# EAGLE board 526_outin_pico_cardedge (EAGLE 9.6.2)
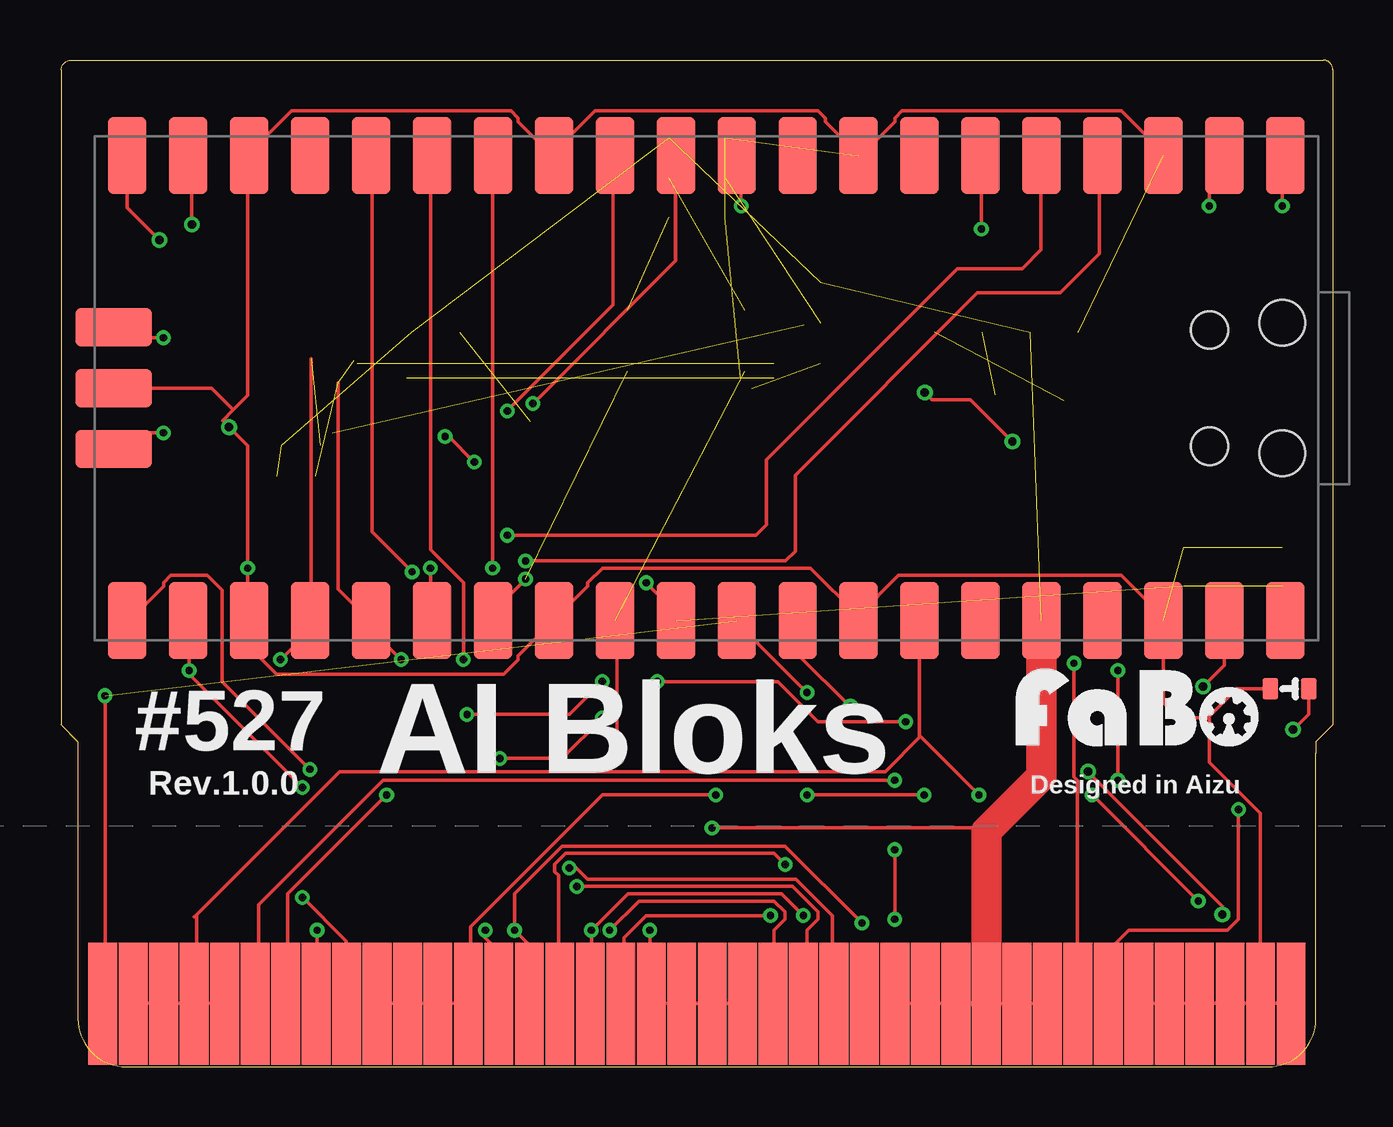
[diagram p0: board, top side]
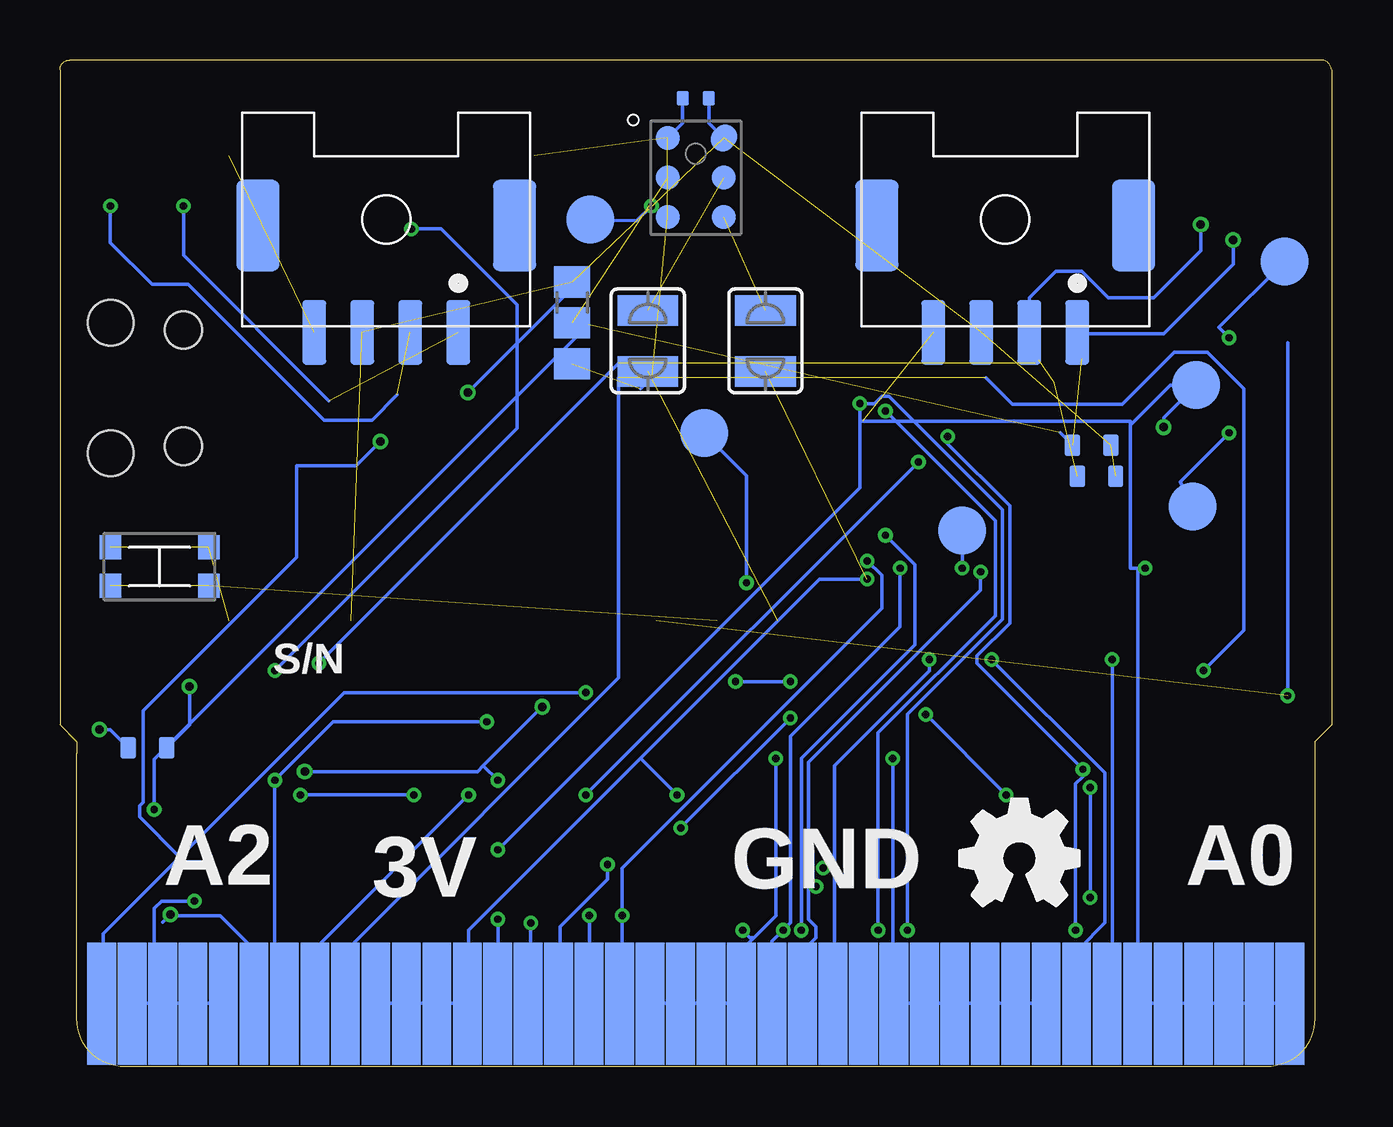
[diagram p1: board, bottom side, seen from below]

Size 53 x 41.95 mm. Coordinates in mm from the lower left corner, seen from the top.
Outline: 0.7,13.07 0.7,13.55 0,14.25 0,41.55 arc-77 0.4,41.95 52.6,41.95 arc-90 53,41.55 53,14.25 52.3,13.55 52.3,13.07
Copper layers (1*16): Top 0.035mm / dielectric 1.6mm / Bottom 0.035mm
Design rules "PCBway": minimum track width 6mil, minimum drill 12mil, track to track 6mil, track to pad 6mil, pad to pad 6mil, via to via 6mil, smd to smd 6mil, copper to edge 10mil, drill to drill 10mil, minimum pad ring 10mil, minimum via ring 6mil, stop-mask expansion 2mil, vias tented up to drill 100mil, thermal gap 8mil

## Footprints (pad centres in the part's own frame; a part is rotated, then mirrored left to right if it is on the bottom)
0402 = smd 0.5 x 0.6: 1 -0.55,0; 2 0.55,0
SM04B-PASS = smd 1 x 2.7: 1 3,-11.85; 2 1,-11.85; 3 -1,-11.85; 4 -3,-11.85 | smd 1.8 x 3.8: P$1 5.35,-7.4; P$2 -5.35,-7.4
TP20R = smd 2 x 2: TP 0,0
A0R-JMP = smd 1.5 x 1.3: 1 0,1.7; 2 0,0; 3 0,-1.7
0603 = smd 0.65 x 0.9: ANODE -0.8,0; CATHODE 0.8,0
0603' = smd 0.65 x 0.9: 1 -0.8,0; 2 0.8,0
KMR2 = smd 0.9 x 1: 1 -2.05,0.8; 2 2.05,0.8; 3 2.05,-0.8; 4 -2.05,-0.8
SJW = smd 1.27 x 2.54: 1 -1.27,0; 2 1.27,0
RASPBERRY_PI_PICO_SMD = smd 3.2 x 1.6: 1 -9.69,24.13; 2 -9.69,21.59; 3 -9.69,19.05; 4 -9.69,16.51; 5 -9.69,13.97; 6 -9.69,11.43; 7 -9.69,8.89; 8 -9.69,6.35; 9 -9.69,3.81; 10 -9.69,1.27; 11 -9.69,-1.27; 12 -9.69,-3.81; 13 -9.69,-6.35; 14 -9.69,-8.89; 15 -9.69,-11.43; 16 -9.69,-13.97; 17 -9.69,-16.51; 18 -9.69,-19.05; 19 -9.69,-21.59; 20 -9.69,-24.13; 21 9.69,-24.13; 22 9.69,-21.59; 23 9.69,-19.05; 24 9.69,-16.51; 25 9.69,-13.97; 26 9.69,-11.43; 27 9.69,-8.89; 28 9.69,-6.35; 29 9.69,-3.81; 30 9.69,-1.27; 31 9.69,1.27; 32 9.69,3.81; 33 9.69,6.35; 34 9.69,8.89; 35 9.69,11.43; 36 9.69,13.97; 37 9.69,16.51; 38 9.69,19.05; 39 9.69,21.59; 40 9.69,24.13 | smd 1.6 x 3.2: D1 -2.54,-24.7; D2 0,-24.7; D3 2.54,-24.7 | hole 1.9: 2.725,24; -2.725,24 | hole 1.55: 2.425,20.97; -2.425,20.97
SPM4050 = smd 1 x 1: 1:GND -1.169,1.651; 2:LEFT/RIGHT -1.169,0; 3:GND -1.169,-1.651; 4:CLOCK 1.169,-1.651; 5:DATA 1.169,0 | smd 1.15 x 1 rotated 45: 6:VDD 1.169,1.651
BBC_EDGE = smd 1.2 x 5.08: P$1 -50.215,2.673; P$2 -48.945,2.673; P$3 -47.675,2.673; P$4 -46.405,2.673; P$5 -45.135,2.673; P$6 -43.865,2.673; P$7 -42.595,2.673; P$8 -41.325,2.673; P$9 -40.055,2.673; P$10 -38.785,2.673; P$11 -37.515,2.673; P$12 -36.245,2.673; P$13 -34.975,2.673; P$14 -33.705,2.673; P$15 -32.435,2.673; P$16 -31.165,2.673; P$17 -29.895,2.673; P$18 -28.625,2.673; P$19 -27.355,2.673; P$20 -26.085,2.673; P$21 -24.815,2.673; P$22 -23.545,2.673; P$23 -22.275,2.673; P$24 -21.005,2.673; P$25 -19.735,2.673; P$26 -18.465,2.673; P$27 -17.195,2.673; P$28 -15.925,2.673; P$29 -14.655,2.673; P$30 -13.385,2.673; P$31 -12.115,2.673; P$32 -10.845,2.673; P$33 -9.575,2.673; P$34 -8.305,2.673; P$35 -7.035,2.673; P$36 -5.765,2.673; P$37 -4.495,2.673; P$38 -3.225,2.673; P$39 -1.955,2.673; P$40 -0.685,2.673 | smd 1.2 x 5.08 bottom: P$41 -0.685,2.673; P$42 -1.955,2.673; P$43 -3.225,2.673; P$44 -4.495,2.673; P$45 -5.765,2.673; P$46 -7.035,2.673; P$47 -8.305,2.673; P$48 -9.575,2.673; P$49 -10.845,2.673; P$50 -12.115,2.673; P$51 -13.385,2.673; P$52 -14.655,2.673; P$53 -15.925,2.673; P$54 -17.195,2.673; P$55 -18.465,2.673; P$56 -19.735,2.673; P$57 -21.005,2.673; P$58 -22.275,2.673; P$59 -23.545,2.673; P$60 -24.815,2.673; P$61 -26.085,2.673; P$62 -27.355,2.673; P$63 -28.625,2.673; P$64 -29.895,2.673; P$65 -31.165,2.673; P$66 -32.435,2.673; P$67 -33.705,2.673; P$68 -34.975,2.673; P$69 -36.245,2.673; P$70 -37.515,2.673; P$71 -38.785,2.673; P$72 -40.055,2.673; P$73 -41.325,2.673; P$74 -42.595,2.673; P$75 -43.865,2.673; P$76 -45.135,2.673; P$77 -46.405,2.673; P$78 -47.675,2.673; P$79 -48.945,2.673; P$80 -50.215,2.673

## Placement (x,y rotation side)
C1  0.1uF  [0402]  26.5,40.35 0 bottom
CN1  [SM04B-PASS]  39.4,42.45 0 bottom
CN2  [SM04B-PASS]  13.6,42.45 0 bottom
GP7  TPSQTP20R  [TP20R]  30.9,35.3 0 bottom
JMP1  0R-JUMPA  [A0R-JMP]  31.65,31 0 bottom
LED1  [0603]  51.2,15.75 180 top
LOGO1  [LOGO_OSHW_M_BOTTOM]  13,8.69 0 top
LOGO2  [LOGO_FABO_M]  44.86,12.97 0 top
R1  470  [0603']  49.35,13.3 180 bottom
R2  [0603']  9.8,24.6 0 bottom
R3  [0603']  10,25.9 0 bottom
S2  [KMR2]  48.85,20.84 180 bottom
SJ1  [SJW]  23.6,30.25 270 bottom
SJ2  [SJW]  28.5,30.25 270 bottom
TP1  TPSQTP20R  [TP20R]  1.95,33.55 0 bottom
TP2  TPSQTP20R  [TP20R]  5.8,23.35 0 bottom
TP3  TPSQTP20R  [TP20R]  5.65,28.4 0 bottom
TP4  TPSQTP20R  [TP20R]  26.15,26.4 0 bottom
TP10  TPSQTP20R  [TP20R]  15.4,22.35 0 bottom
U1  [RASPBERRY_PI_PICO_SMD]  26.89,28.28 270 top
U$1  SPM0405H  [SPM4050]  26.5,37.05 0 bottom
U$2  BBC_EDGE  [BBC_EDGE]  51.95,-0.05 0 top

## Library data of the parts
C1 = FaBo-Capacitor
CN1 CN2 = FaBo-Connetor
GP7 TP1-TP4 TP10 = testpad
JMP1 = jump-0r-smd
LED1 = FaBo-LED
LOGO1 LOGO2 = FaBo-Logo
R1-R3 = FaBo-Resistors
S2 = FaBo-Switch
SJ1 SJ2 = jumper
U1 = FaBo-Boards
U$1 = FaBo-Sensor
U$2 = microbit

## Nets
3V3: C1.2 CN1.3 CN2.3 JMP1.1 R2.2 R3.2 U1.36 U$1.6:VDD U$2.P$27 U$2.P$28 U$2.P$29 U$2.P$30 U$2.P$31 U$2.P$32 U$2.P$67 U$2.P$68 U$2.P$69 U$2.P$70 U$2.P$71 U$2.P$72
A0: U1.31 U$2.P$1 U$2.P$41
A1: U1.32 U$2.P$6 U$2.P$46
A2: U1.34 U$2.P$2 U$2.P$3 U$2.P$4 U$2.P$5 U$2.P$42 U$2.P$43 U$2.P$44 U$2.P$45
D2: U1.4 U$2.P$18 U$2.P$58
D3: U1.5 U$2.P$17 U$2.P$57
D4: U1.6 U$2.P$7 U$2.P$47
D5_PWM: U1.7
D6_PWM: U1.9
D8: U1.11 U$2.P$14 U$2.P$54
D9_LEDS: U1.12 U$2.P$15 U$2.P$55
GND: C1.1 CN1.4 CN2.4 JMP1.3 LED1.CATHODE S2.3 S2.4 TP3.TP U1.3 U1.8 U1.13 U1.18 U1.23 U1.28 U1.33 U1.38 U1.D2 U$1.1:GND U$1.3:GND U$2.P$35 U$2.P$36 U$2.P$37 U$2.P$38 U$2.P$39 U$2.P$40 U$2.P$75 U$2.P$76 U$2.P$77 U$2.P$78 U$2.P$79 U$2.P$80
GP14: CN2.2 U1.19
GP15: CN2.1 U1.20
GP16: U$2.P$16 U$2.P$56
GP16_PWM_UART0_TX: U1.21 U$2.P$8 U$2.P$48
GP17_PWM_UART0_RX: U1.22 U$2.P$9 U$2.P$49
I2C1_SCL: R2.1 U1.25 U$2.P$33 U$2.P$73
I2C1_SDA: R3.1 U1.24 U$2.P$34 U$2.P$74
N$1: R1.1 U1.39
N$2: LED1.ANODE R1.2
N$3: GP7.TP U1.10
N$4: TP10.TP U1.26
N$5: JMP1.2 U$1.2:LEFT/RIGHT
N$6: SJ1.1 U$1.4:CLOCK
N$7: SJ2.1 U$1.5:DATA
PDM_CLK: SJ1.2 U1.27 U$2.P$10 U$2.P$11 U$2.P$12 U$2.P$13 U$2.P$50 U$2.P$51 U$2.P$52 U$2.P$53
PDM_DIN: SJ2.2 U1.29 U$2.P$19 U$2.P$20 U$2.P$21 U$2.P$22 U$2.P$59 U$2.P$60 U$2.P$61 U$2.P$62
RESET: S2.1 S2.2 TP4.TP U1.30
RX: CN1.1 U1.2
SPI1_CSN: U1.17
SPI1_RX: U1.16 U$2.P$24 U$2.P$64
SPI1_SCK: U1.14 U$2.P$23 U$2.P$63
SPI1_TX: U1.15 U$2.P$25 U$2.P$65
SWCLK: TP1.TP U1.D1
SWDIO: TP2.TP U1.D3
TX: CN1.2 U1.1

## Tracks (layer width: path | path; a pad name or v marks a point on that pad's centre or on a via)
3V3  (via drill 0.3)  (6 unrouted)
  Top 0.152: U$2.P$27 34.9,2.64 35.97,2.64 U$2.P$28 36.12,2.64 37.19,2.64 U$2.P$29 37.34,2.64 38.56,2.64 39.78,2.64 U$2.P$31 39.93,2.64 41,2.64 U$2.P$32 | v18.29,12.85 20.88,12.85 v22.55,14.53 | v27.13,9.95 37.95,9.95 38.56,9.81
  Top 1.27: U1.36 40.86,12.11 38.56,9.81 38.56,2.64 U$2.P$30
  Bottom 0.152: U$2.P$72 12.04,2.64 13.11,2.64 U$2.P$71 13.26,2.64 14.33,2.64 U$2.P$70 14.48,2.64 15.7,2.64 U$2.P$69 15.85,2.64 16.92,2.64 U$2.P$68 17.07,2.64 18.14,2.64 U$2.P$67 18.29,2.64 v18.29,12.85 | v27.13,9.95 v22.55,14.53 | C1.2 25.95,39.32 U$1.6:VDD
A0  (via drill 0.3, 0.35)  (1 unrouted)
  Top 0.152: v31.09,15.59 28.19,18.49 U1.31 | v1.83,15.46 1.83,2.64 U$2.P$1 | v39.65,26.05 37.9,27.8 36.3,27.8 v36,28.1
  Bottom 0.152: v31.09,15.59 41.15,15.59 48.01,8.73 | 48.01,8.73 51.21,5.53 51.21,2.64 U$2.P$41 | 1.83,30.16 v1.83,15.46 | 48.01,8.73 49.68,10.41 49.68,10.87 49.53,11.02 49.53,14.83 43.13,21.23 43.13,25.05 40.65,25.05 v39.65,26.05 | v36,28.1 32,32.1
A1  (via drill 0.3, 0.35)
  Top 0.152: U1.32 30.7,17.2 v32.9,15 | v42.8,12.3 48.4,6.7 v48.4,6.35 | v34.75,11.93 13.41,11.93 8.23,6.75 8.23,2.64 U$2.P$6
  Bottom 0.152: v32.9,15 35.35,12.54 | 35.35,12.54 35.6,12.3 v42.8,12.3 | 48.73,6.02 v48.4,6.35 48.31,6.29 46.33,6.29 44.96,4.92 44.96,2.64 U$2.P$46 | 35.35,12.54 v34.75,11.93 | 35.36,12.54 35.35,12.54
A2  (via drill 0.3)
  Top 0.152: 35.78,13.73 34.35,12.3 11.6,12.3 5.62,6.32 | 35.78,13.73 U1.34 | 5.54,6.24 5.62,6.32 | U$2.P$2 3.05,2.64 4.27,2.64 U$2.P$3 4.42,2.64 5.49,2.64 U$2.P$4 5.64,2.64 | 5.64,2.64 6.71,2.64 U$2.P$5 | 5.64,2.64 5.64,6.29 5.62,6.32 | v38.25,11.33 35.81,13.76 35.78,13.73 | v47.4,6.9 v42.98,11.33
  Bottom 0.152: U$2.P$45 46.33,2.64 47.4,2.64 U$2.P$44 47.55,2.64 48.62,2.64 U$2.P$43 | 49.07,2.64 48.77,2.64 U$2.P$43 | 49.07,2.64 49.99,2.64 U$2.P$42 | v42.98,11.33 v38.25,11.33 | v47.4,6.9 48.77,6.9 49.07,6.6 49.07,2.64 | 49.07,2.64 U$2.P$43
D2  (via drill 0.3)
  Top 0.152: v19.36,21.08 30.2,21.08 30.6,21.48 30.6,24.65 38.2,32.25 41.65,32.25 43.28,33.88 43.28,37.84 U1.4 | v29.57,6.29 24.38,6.29 23.47,5.38 23.47,2.64 U$2.P$18
  Bottom 0.152: v19.36,21.08 18.75,20.47 18.75,19.1 29.57,8.28 v29.57,6.29 29.57,2.64 U$2.P$58
D3  (via drill 0.3)
  Top 0.152: v18.59,22.14 28.96,22.14 29.4,22.59 29.4,25.3 37.35,33.25 40.06,33.25 40.84,34.03 40.84,37.84 U1.5 | U$2.P$17 22.1,2.64 v22.1,5.69 23.62,7.21 30.02,7.21 v30.94,6.29
  Bottom 0.152: v18.59,22.14 17.37,20.93 17.37,17.57 22.1,12.85 v22.1,5.69 | v30.94,6.29 30.94,2.64 U$2.P$57
D4  (via drill 0.3)
  Top 0.152: v38.35,34.91 38.35,37.92 U1.6 | v44.04,11.93 v44.04,16.51 | v13.56,11.33 9.45,7.21 9.45,2.64 U$2.P$7 | v16.92,14.68 21.18,14.68 v22.55,16.05 | v24.84,16.05 29.87,16.05 31.55,14.37 v35.2,14.37
  Bottom 0.152: v38.35,34.91 37.1,34.91 33.95,31.76 33.95,26.59 v44.04,16.51 | U$2.P$47 43.74,2.64 44.04,2.94 v44.04,11.93 41.6,14.37 v35.2,14.37 | v16.92,14.68 v13.56,11.33 | v24.84,16.05 v22.55,16.05
D8  (via drill 0.3)
  Top 0.152: v19.66,27.63 25.6,33.57 25.6,37.84 U1.11 | v17.68,5.69 17.68,5.38 18.14,4.92 18.14,2.64 U$2.P$14 | v34.75,9.04 v34.75,6.14
  Bottom 0.152: v17.68,5.69 17.68,14.68 13.72,18.64 13.72,23.21 18.44,27.94 18.75,27.94 19.05,27.63 v19.66,27.63 19.66,24.13 v34.75,9.04 | v34.75,6.14 34.75,2.64 U$2.P$54
D9_LEDS  (via drill 0.3)
  Top 0.152: v18.59,27.33 23.01,31.75 23.01,37.84 U1.12 | U$2.P$15 19.51,2.64 19.51,5.08 v18.9,5.69 18.9,7.21 20.88,9.19 30.18,9.19 v33.38,5.99
  Bottom 0.152: v18.59,27.33 14.02,22.75 14.02,18.79 18.9,13.92 v18.9,5.69 | v33.38,5.99 33.38,2.64 U$2.P$55
GND  (via drill 0.3, 0.35)  (8 unrouted)
  Top 0.152: LED1.CATHODE 49,15.75 47.8,14.55 | 47.8,14.55 46.55,14.55 45.94,15.16 U1.38 46.02,18.64 44.2,20.47 34.9,20.47 33.22,18.79 | 33.22,18.79 33.38,18.64 U1.33 33.22,18.79 | 33.22,18.79 31.24,20.77 22.55,20.77 21.95,20.16 21.95,20.01 20.57,18.64 U1.28 20.42,18.49 19.05,17.12 19.05,16.96 18.44,16.35 8.99,16.35 7.92,17.42 7.92,18.49 U1.23 7.77,18.64 v7.77,20.77 7.77,25.88 v7,26.65 6.72,26.92 7.17,27.37 | U$2.P$35 44.96,2.64 46.18,2.64 U$2.P$36 46.33,2.64 47.4,2.64 U$2.P$37 47.55,2.64 48.62,2.64 U$2.P$38 48.77,2.64 49.99,2.64 | 49.99,2.64 49.99,10.56 47.85,12.7 47.85,14.53 47.8,14.55 | U$2.P$40 51.21,2.64 50.14,2.64 U$2.P$39 49.99,2.64 | U1.3 46.02,37.99 44.2,39.82 35.05,39.82 34.75,39.52 34.75,39.37 33.38,37.99 U1.8 33.22,37.99 31.85,39.37 31.85,39.52 31.55,39.82 22.25,39.82 20.42,37.99 | U1.D2 2.29,28.39 3.05,28.39 U1.D2 | 20.42,37.99 19.05,39.37 19.05,39.52 18.75,39.82 9.6,39.82 7.77,37.99 U1.18 7.77,37.84 7.77,27.97 7.17,27.37 | 20.42,37.99 U1.13 | U1.D2 6.27,28.28 7.17,27.37
  Bottom 0.152: U$2.P$80 1.83,2.64 2.9,2.64 U$2.P$79 3.05,2.64 4.27,2.64 U$2.P$78 4.42,2.64 5.49,2.64 U$2.P$77 5.64,2.64 6.71,2.64 U$2.P$76 6.86,2.64 8.08,2.64 | 28.8,28.24 28.32,28.72 | 8.38,26.73 6.72,28.39 5.79,28.39 TP3.TP 7,27.05 v7,26.65 | 19.55,26.89 8.38,26.89 8.38,26.73 | 8.38,26.73 8.38,20.77 8.08,20.77 | 8.08,20.77 8.08,2.64 | 8.08,2.64 U$2.P$75 | v7.77,20.77 8.08,20.77 | U$1.1:GND 27.05,39.32 C1.1
GP14  (via drill 0.35)
  Top 0.152: U1.19 5.33,37.84 5.45,37.73 v5.45,35.1
  Bottom 0.152: CN2.2 12.6,32.05 11.5,33.15 10.4,33.15 9.3,32.05 7.4,32.05 5.45,34 v5.45,35.1
GP15  (via drill 0.35)
  Top 0.152: 2.74,37.84 U1.20 2.76,35.79 v4.1,34.45
  Bottom 0.152: CN2.1 10.55,30.55 7,30.55 4.1,33.45 v4.1,34.45
GP16  (via drill 0.3)
  Top 0.152: v30.18,8.43 29.72,8.89 21.03,8.89 20.57,8.43 20.57,8.12 20.73,7.97 20.73,2.64 U$2.P$16
  Bottom 0.152: v30.18,8.43 30.18,7.82 32.16,5.84 32.16,2.64 U$2.P$56
GP16_PWM_UART0_TX  (via drill 0.3)
  Top 0.152: v10.36,12.39 6.71,16.05 6.71,19.86 6.1,20.47 4.57,20.47 4.27,20.16 4.27,20.01 2.9,18.64 U1.21 | v10.67,5.69 10.67,2.64 U$2.P$8 | v31.09,11.33 v35.97,11.33 | v17.22,25.19 16.15,26.26 v16,26.26
  Bottom 0.152: v10.67,5.69 10.67,11.78 10.36,12.09 v10.36,12.39 14.78,16.81 14.78,17.12 13.41,18.49 13.41,23.36 16,25.96 v16,26.26 | v35.97,11.33 42.37,4.92 42.37,2.64 U$2.P$48 | v17.22,25.19 v31.09,11.33
GP17_PWM_UART0_RX  (via drill 0.3)  (1 unrouted)
  Top 0.152: v10.06,11.63 5.33,16.35 v5.33,16.51 5.33,18.49 U1.22 | v10.06,7.06 11.89,5.23 11.89,2.64 U$2.P$9
  Bottom 0.152: v10.06,7.06 v10.06,11.63 | 29.72,28.7 29.72,16.2 41,4.92 41,2.64 U$2.P$49 | 14.4,28.7 13.3,27.6 8.72,27.6 6.55,29.77 5.18,29.77 3.66,28.24 3.66,18.18 v5.33,16.51
I2C1_SCL  (via drill 0.3)  (3 unrouted)
  Top 0.152: v14.17,16.96 12.95,18.18 12.95,18.49 U1.25 12.8,18.64 11.54,19.9 11.54,28.51 | v42.22,16.81 42.22,12.09 42.37,11.93 42.37,2.64 U$2.P$33
  Bottom 0.152: v14.17,16.96 9.45,12.24 9.45,5.99 10.52,4.92 10.52,2.64 U$2.P$73 | 29.72,29.31 v42.22,16.81 | 12.21,29.45 12.34,29.31
I2C1_SDA  (via drill 0.3)  (2 unrouted)
  Top 0.152: v9.14,16.96 10.36,18.18 10.36,18.49 U1.24 10.43,18.61 10.43,29.5 | v49.07,10.71 49.07,6.14 48.62,5.69 44.5,5.69 43.74,4.92 43.74,2.64 U$2.P$34
  Bottom 0.152: v9.14,16.96 9.14,2.79 9.3,2.64 U$2.P$74 | 30.97,30.92 49.07,12.82 v49.07,10.71 | R3.1 11.31,26.41
N$1  (via drill 0.35)
  Top 0.152: U1.39 48.48,16.73 v47.6,15.85
  Bottom 0.152: v47.6,15.85 47.6,14.25 R1.1
N$2  (via drill 0.35)
  Top 0.152: v51.35,14.05 52,14.7 LED1.ANODE
  Bottom 0.152: R1.2 50.9,14.05 v51.35,14.05
N$3  (via drill 0.3)
  Top 0.152: v28.35,35.86 28.35,37.69 28.19,37.84 U1.10
  Bottom 0.152: v28.35,35.86 28.96,35.24 GP7.TP
N$4  (via drill 0.3)
  Top 0.152: v15.39,20.77 15.39,18.64 U1.26
  Bottom 0.152: v15.39,20.77 15.39,22.3 TP10.TP
N$5  (1 unrouted)
N$6  (1 unrouted)
N$7  (1 unrouted)
PDM_CLK  (via drill 0.3)  (1 unrouted)
  Top 0.152: U$2.P$10 13.26,2.64 14.33,2.64 U$2.P$11 14.48,2.64 15.7,2.64 U$2.P$12 15.85,2.64 16.92,2.64 U$2.P$13 17.07,2.64 17.07,5.84 22.55,11.33 v27.28,11.33 | v19.36,20.32 18.14,19.1 18.14,18.64 U1.27
  Bottom 0.152: U$2.P$50 39.78,2.64 38.71,2.64 U$2.P$51 38.56,2.64 37.34,2.64 U$2.P$52 37.19,2.64 36.12,2.64 U$2.P$53 35.97,2.64 35.97,5.69 28.8,12.85 | v19.36,20.32 21.34,20.32 28.8,12.85 | 28.8,12.85 v27.28,11.33
PDM_DIN  (via drill 0.3)  (1 unrouted)
  Top 0.152: U$2.P$22 28.35,2.64 27.28,2.64 U$2.P$21 27.13,2.64 25.91,2.64 U$2.P$61 25.76,2.64 24.69,2.64 U$2.P$62 24.54,2.64 v24.54,5.69 | v23.16,12.85 23.16,18.49 U1.29
  Bottom 0.152: U$2.P$22 28.35,2.64 27.28,2.64 U$2.P$21 27.13,2.64 25.91,2.64 U$2.P$61 25.76,2.64 24.69,2.64 U$2.P$62 24.54,2.64 24.54,4.92 24.08,5.38 | v23.16,12.85 23.16,6.29 24.08,5.38 | v24.54,5.69 24.23,5.38 24.08,5.38
RESET  (via drill 0.3)  (2 unrouted)
  Top 0.152: v24.38,20.16 25.6,18.95 25.6,18.64 U1.30
  Bottom 0.152: 26.1,26.4 TP4.TP 24.38,24.63 v24.38,20.16
RX  (via drill 0.3)  (1 unrouted)
  Top 0.152: v47.85,35.86 47.85,37.23 48.46,37.84 U1.2
  Bottom 0.152: 41.79,27.75 47.85,33.81 v47.85,35.86
SPI1_RX  (via drill 0.3)
  Top 0.152: v14.63,20.62 12.95,22.3 12.95,37.84 U1.16 | v21.49,7.51 30.48,7.51 31.55,6.45 31.55,6.14 31.09,5.69 31.09,2.64 U$2.P$24
  Bottom 0.152: v14.63,20.62 14.63,19.86 21.79,12.7 21.79,7.51 | 21.79,7.51 21.79,6.14 21.49,5.84 21.49,5.38 21.95,4.92 21.95,2.64 U$2.P$64 | 21.79,7.51 v21.49,7.51
SPI1_SCK  (via drill 0.3)
  Top 0.152: v17.98,20.77 17.98,37.84 U1.14 | v22.86,5.69 24.08,6.9 29.72,6.9 30.18,6.45 30.18,6.14 29.72,5.69 29.72,2.64 U$2.P$23
  Bottom 0.152: v17.98,20.77 17.98,18.34 22.55,13.76 22.55,5.99 v22.86,5.69 23.32,5.23 23.32,2.64 U$2.P$63
SPI1_TX  (via drill 0.3)
  Top 0.152: v16.76,16.96 16.76,20.16 15.39,21.54 15.39,37.84 U1.15 | v21.18,8.28 21.49,8.28 21.95,7.82 30.63,7.82 32.16,6.29 32.16,2.64 U$2.P$25
  Bottom 0.152: v16.76,16.96 16.76,16.51 20.73,12.54 20.73,8.28 | 20.73,8.28 20.73,2.64 U$2.P$65 | 20.73,8.28 v21.18,8.28
SWCLK  (via drill 0.3)
  Top 0.152: v4.27,30.38 2.59,30.38 2.29,30.68 U1.D1
  Bottom 0.152: TP1.TP 4.69,30.8 v4.27,30.38
SWDIO  (via drill 0.3)
  Top 0.152: v4.27,26.41 2.9,26.41 2.29,25.8 U1.D3
  Bottom 0.152: v4.27,26.41 6.3,24.38 TP2.TP
TX  (via drill 0.3)  (1 unrouted)
  Top 0.152: v50.9,35.86 50.9,37.84 U1.1
  Bottom 0.152: v50.9,35.86 50.9,34.34 49.16,32.6 47.65,32.6 42,26.95 40,26.95 38.95,28

## Text on the board
tPlace: #527 | AI Bloks | Designed in Aizu | Rev.1.0.0
bPlace: S/N | A0 | GND | A2 | 3V
Document: Raspberry Pi Pico CardEdge / 2022/06/08 Rev1.0.0
bDocu: MIC | RESET